# Altium PCB Bee Hive MainBoard PCB.PcbDoc
Units mm, origin at the board's own origin, x right, y up, seen from the top; angles counter-clockwise.
Board outline 90 x 57 mm, 2 copper layers (Top Layer, Bottom Layer), stack 1.671 mm thick; 32 components, 36 nets, 165 pads, 50 vias.
Unrouted connection lines stored in the file: 173.
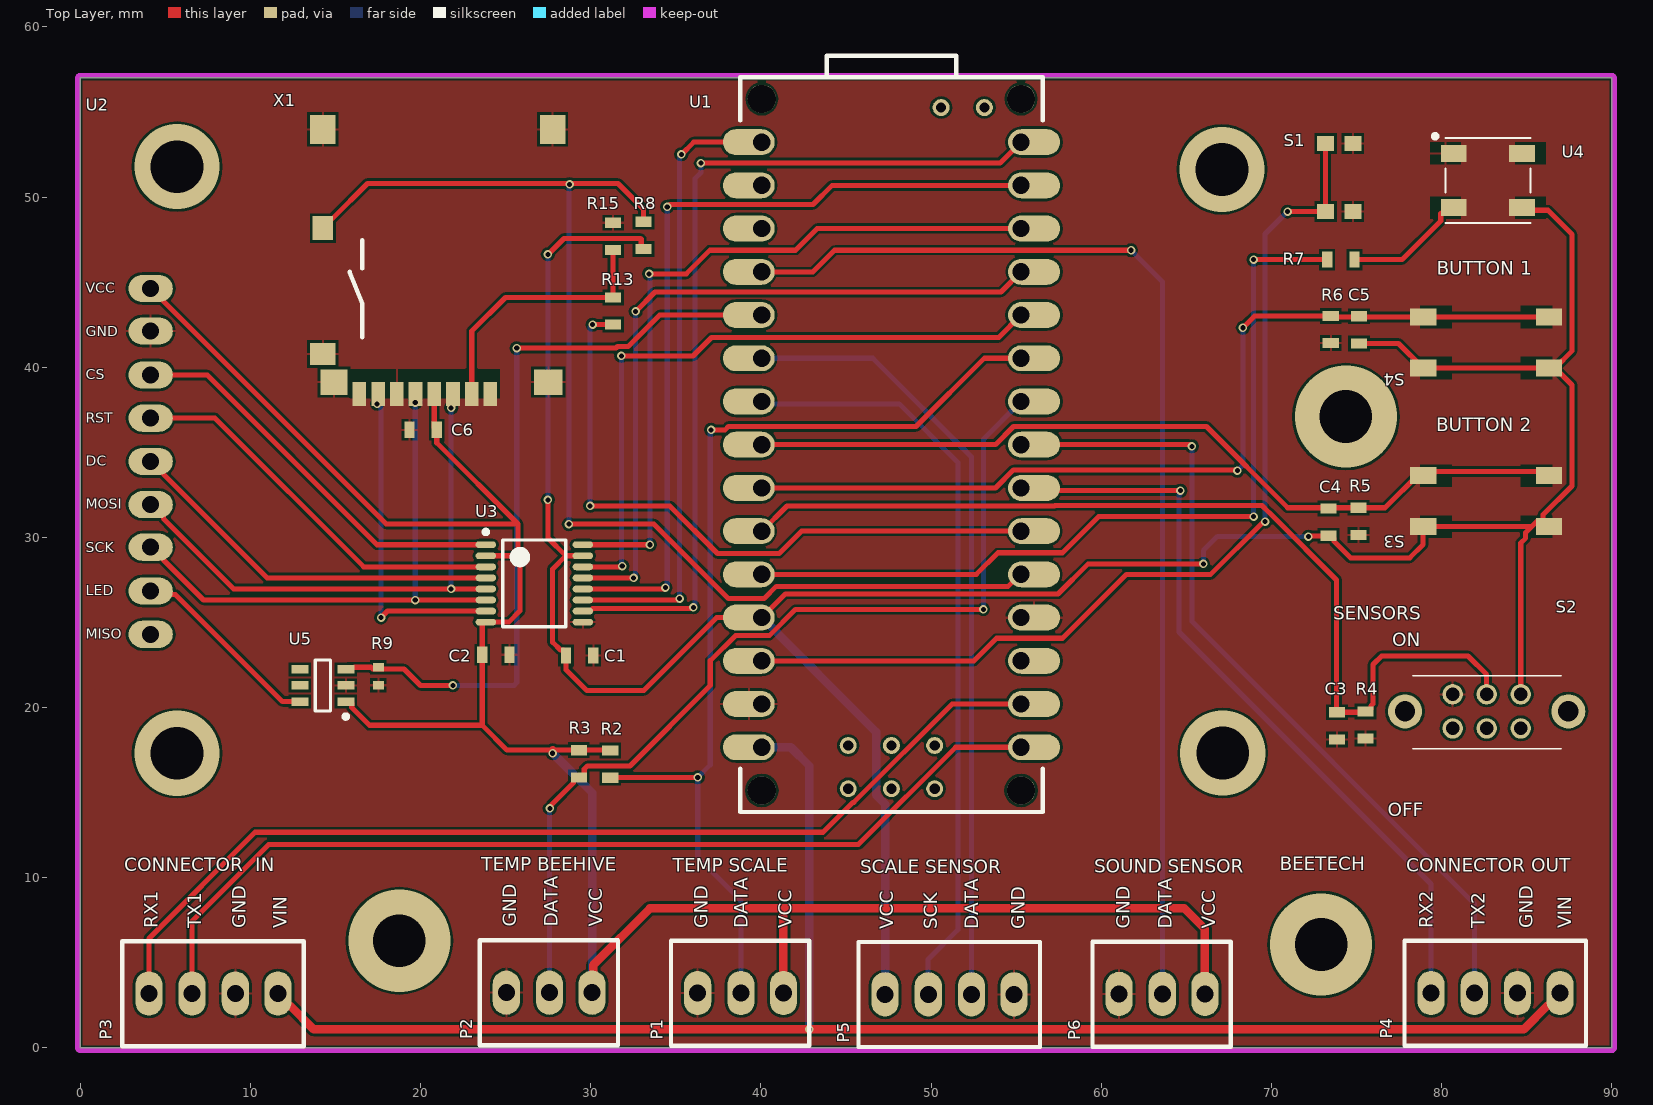
[diagram p0: Top Layer view]
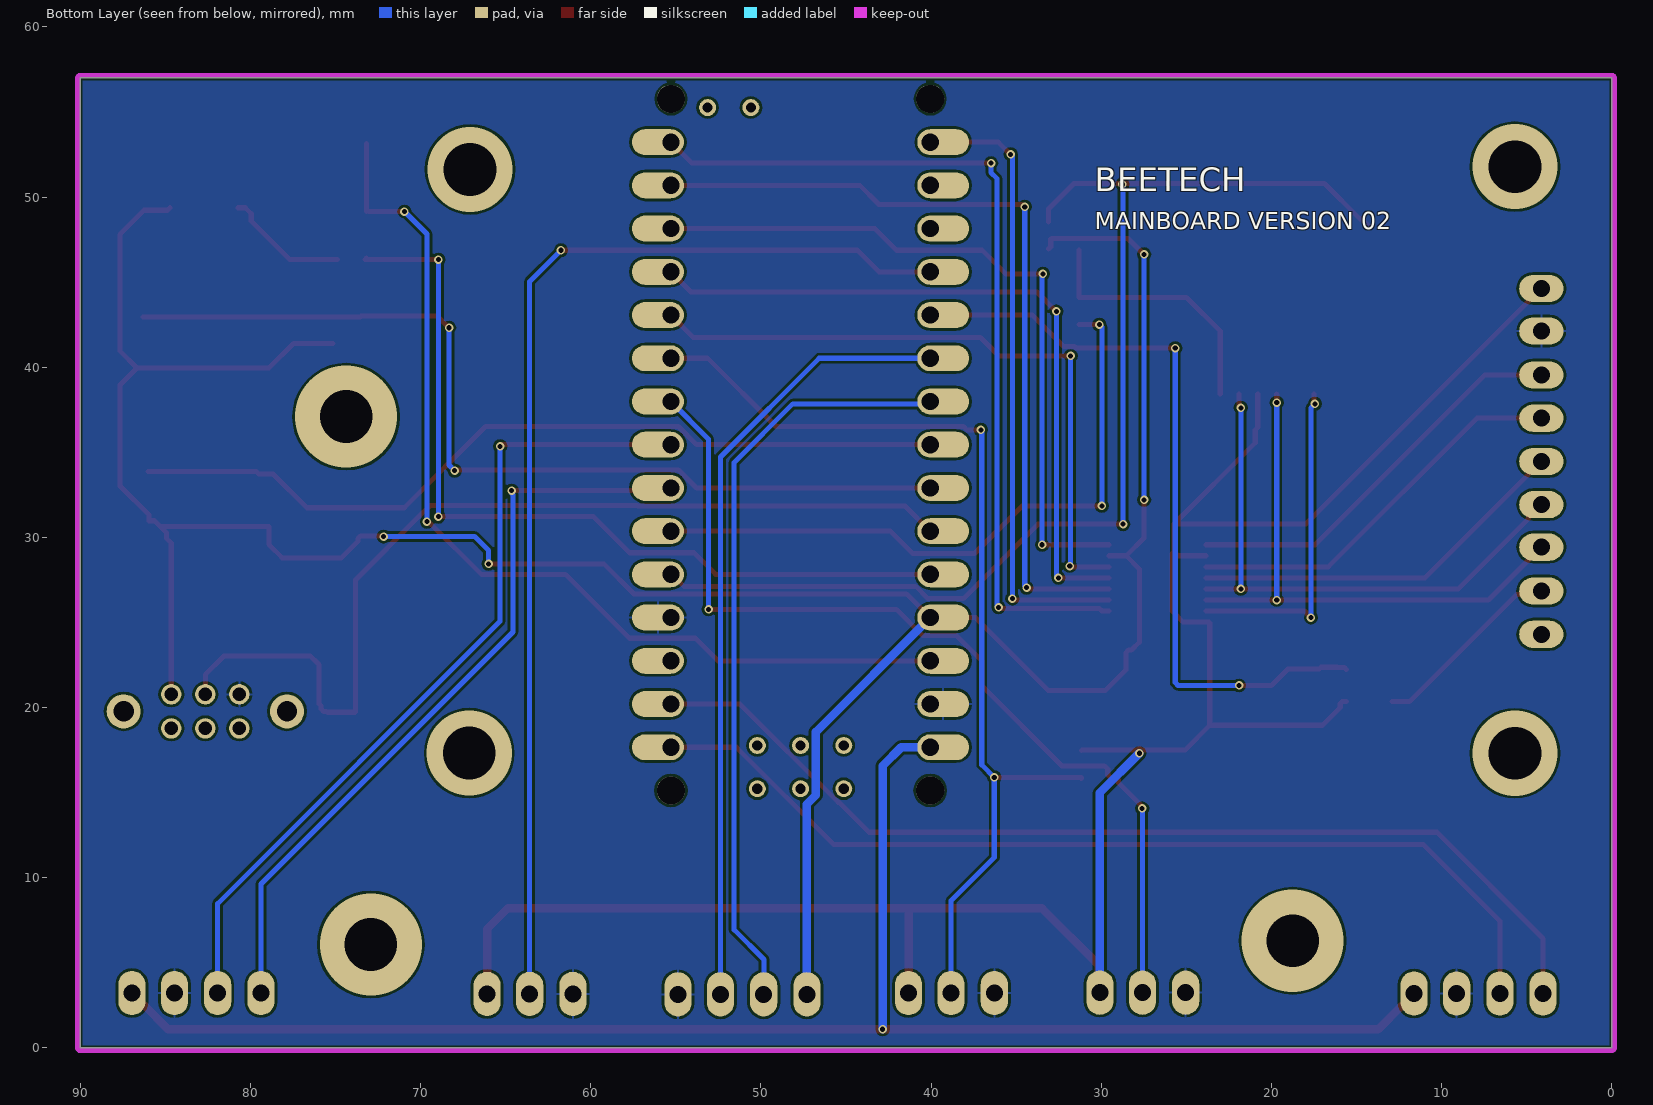
[diagram p1: Bottom Layer view, seen from below]

## Layer stack, top to bottom
Top Solder: solder mask 0.0102, Solder Resist, Dk 3.5
Top Layer: signal copper 0.0356
Dielectric1: core 1.6, FR-4, Dk 4.8
Bottom Layer: signal copper 0.0356
Bottom Solder: solder mask 0.0102, Solder Resist, Dk 3.5

## Board outline
0,0 90,0 90,57 0,57

## Design rules (kind name [scope] priority, off if disabled: settings)
Clearance Clearance_1 [InNamedPolygon('SW_L01_P024')] p1: gap=0.254 ignorepadtopadclearanceinfootprint=FALSE except(0: Arc-Hole Track-Hole SMDPad-Hole THPad-Hole Via-Hole Fill-Hole Poly-Hole Region-Hole Text-Hole)
Clearance [All] p2: gap=0.15 ignorepadtopadclearanceinfootprint=FALSE
ComponentClearance [All] p1: gap=0.001 collisioncheckmode=3 verticalgap=0.254 showdistances=FALSE
FabricationTestPointUsage [All] p1 off: valid=0 allowmultiple=FALSE
FabricationTestpoint [All] p1 off: side=3 testpointundercomponent=TRUE minsize=1.016 maxsize=2.54 preferedsize=1.524 minholesize=0 maxholesize=1.016 preferedholesize=0.813 testpointgrid=0.025 allowsidetop=TRUE allowsidebottom=TRUE usegrid=TRUE gridtolerance=0
HoleSize [All] p1: absolutevalues=TRUE maxlimit=6 minlimit=0.025 maxpercent=80.000 minpercent=20.000
HoleToHoleClearance [All] p1: gap=0 allowstackedmicrovias=TRUE
MinimumSolderMaskSliver [All] p1: minsoldermaskwidth=0
PolygonConnect PolygonConnect_14 [All vs IsNamedPolygon('GND_L01_P041')] p1: connectstyle=Relief reliefconductorwidth=0.15 reliefentries=4 polygonreliefangle="90 Angle" airgapwidth=0.15
PolygonConnect V_BAT_L01_P036 [All vs IsNamedPolygon('V_BAT_L01_P036')] p2: connectstyle=Direct reliefconductorwidth=0.254 reliefentries=4 polygonreliefangle="90 Angle" airgapwidth=0.254
PolygonConnect V_BAT2 [All vs IsNamedPolygon('V_BAT2_L01_P004')] p3: connectstyle=Direct reliefconductorwidth=0.254 reliefentries=4 polygonreliefangle="90 Angle" airgapwidth=0.254
PolygonConnect V_BAT [All vs IsNamedPolygon('V_BAT_L01_P010')] p4: connectstyle=Direct reliefconductorwidth=0.254 reliefentries=4 polygonreliefangle="90 Angle" airgapwidth=0.254
PolygonConnect V_SYS2 [All vs IsNamedPolygon('V_SYS2_L01_P012')] p5: connectstyle=Direct reliefconductorwidth=0.254 reliefentries=4 polygonreliefangle="90 Angle" airgapwidth=0.254
PolygonConnect +3.3b_uBlox [All vs IsNamedPolygon('+3.3V_UBLOX_L01_P014')] p6: connectstyle=Direct reliefconductorwidth=0.254 reliefentries=4 polygonreliefangle="90 Angle" airgapwidth=0.254
PolygonConnect V_LIPO_SYS_L01_P016 [All vs IsNamedPolygon('V_LIPO_SYS_L01_P016')] p7: connectstyle=Direct reliefconductorwidth=0.254 reliefentries=4 polygonreliefangle="90 Angle" airgapwidth=0.254
PolygonConnect V_LIPO_SYS_L01_P020 [All vs IsNamedPolygon('V_LIPO_SYS_L02_P020')] p8: connectstyle=Direct reliefconductorwidth=0.254 reliefentries=4 polygonreliefangle="90 Angle" airgapwidth=0.254
PolygonConnect V_SYS_L02_P024 [All vs IsNamedPolygon('V_SYS_L02_P024')] p9: connectstyle=Direct reliefconductorwidth=0.254 reliefentries=4 polygonreliefangle="90 Angle" airgapwidth=0.254
PolygonConnect VCC_USB_5.0V_L01_P026 [All vs IsNamedPolygon('VCC_USB_5.0V_L01_P026')] p10: connectstyle=Direct reliefconductorwidth=0.254 reliefentries=4 polygonreliefangle="90 Angle" airgapwidth=0.254
PolygonConnect SW [All vs IsNamedPolygon('SW_L01_P008')] p11: connectstyle=Direct reliefconductorwidth=0.254 reliefentries=4 polygonreliefangle="90 Angle" airgapwidth=0.254
PolygonConnect [All] p12: connectstyle=Relief reliefconductorwidth=0.15 reliefentries=4 polygonreliefangle="90 Angle" airgapwidth=0.15
RoutingVias [All] p1: holewidth=0.3 width=0.5 viastyle="Through Hole" minholewidth=0.2 minwidth=0.3 maxholewidth=1.2 maxwidth=2 useviatemplates=TRUE viatemplateguid#1={68F519FB-439D-452A-8ACF-2DE296BA9197} viatemplateguid#2={5ED9683F-E5DF-4E78-BDB1-49E541A8EC46} viatemplateguid#3={FAFF2F81-81C9-46E2-9D3D-D8AEF9417303} viatemplateguid#4={175E6F9D-763D-42D4-A59E-C21ACC7DA2E1} viatemplatename#1=v50h30m0mx0 viatemplatename#2=v50h30m50mx0 viatemplatename#3=v50h20 viatemplatename#4=v50h20mx0
SilkToSilkClearance [All] p1: silktosilkclearance=0.152
SilkToSolderMaskClearance [IsPad] p1: minsilkscreentomaskgap=0.127 clearancetoexposedcopper=TRUE
SolderMaskExpansion [All] p1: expansion=0.102 istentingtop=FALSE
Width [All] p1: maxlimit=5.08 minlimit=0.01 preferedwidth=0.305 minimp=50.000000 maximp=50.000000 favimp=50.000000
22 further rules are at their usual default settings.

## Components (designator, comment, footprint, x,y, rotation, side; value= is the part's Value field where it differs from the comment)
C1 "100nF 0603_1" "CAP 0603" 29.349,23.055 r180 top value=100nF
C2 "100nF 0603_1" "CAP 0603" 24.424,23.106 r180 top value=100nF
C3 "100nF 0603" "CAP 0603" 73.85,18.925 r270 top value=100nF
C4 "100nF 0603" "CAP 0603" 73.348,30.895 r90 top value=100nF
C5 "100nF 0603" "CAP 0603" 75.149,42.202 r90 top value=100nF
C6 "10uF 0603" "CAP 0603" 20.151,36.325 r0 top value=10uF
P1 "3-Pin Right Angle Housing" "3PIN - RND 205-EK254-2.54-03P" 41.325,3.225 r270 top
P2 "3-Pin Right Angle Housing" "3PIN - RND 205-EK254-2.54-03P" 30.078,3.25 r270 top
P3 "4-Pin Right Angle Housing" "4PIN - RND 205-EK254-2.54-04P" 11.615,3.2 r270 top
P4 "4-Pin Right Angle Housing" "4PIN - RND 205-EK254-2.54-04P" 86.965,3.225 r270 top
P5 "4-Pin Right Angle Housing" "4PIN - RND 205-EK254-2.54-04P" 54.875,3.15 r270 top
P6 "3-Pin Right Angle Housing" "3PIN - RND 205-EK254-2.54-03P" 66.09,3.175 r270 top
R2 "4.7k Ohm 0603" "RES 0603 FOOTPRINT" 31.15,16.675 r270 top value=4.7k
R3 "4.7k Ohm 0603" "RES 0603 FOOTPRINT" 29.3,16.7 r270 top value=4.7k
R4 "1k Ohm 0603" "RES 0603 FOOTPRINT" 75.525,18.978 r90 top value=1k
R5 "10k Ohm 0603" "RES 0603 FOOTPRINT" 75.123,30.945 r90 top value=10k
R6 "10k Ohm 0603" "RES 0603 FOOTPRINT" 73.489,42.22 r90 top value=10k
R7 "470 Ohm 0603" "RES 0603 FOOTPRINT" 74.075,46.325 r0 top value=470
R8 "47k Ohm 0603" "RES 0603 FOOTPRINT" 33.096,47.752 r270 top value=47k
R9 "47k Ohm 0402" "RES 0402 FOOTPRINT" 17.526,21.844 r90 top value=47k
R13 "2k Ohm 0603" "RES 0603 FOOTPRINT" 31.316,43.307 r270 top value=2k
R15 "2k Ohm 0603" "RES 0603 FOOTPRINT" 31.316,47.692 r270 top value=2k
S1 "Taster Print_SMD_2" "Taster Print - SMD - KMR241G LFS" 73.989,51.15 r270 top
S2 "Schiebeschalter EG2207" "Schiebeschalter on-on 2 P, EG2207" 82.65,19.778 r0 top
S3 "Taster Print_SMD_3" "Taster Print - SMD - PTS647SM70SMTR2LFS" 82.616,32.134 r180 top
S4 "Taster Print_SMD_3" "Taster Print - SMD - PTS647SM70SMTR2LFS" 82.616,41.456 r180 top
U1 "Arduino Nano Every" "Arduino Nano Every" 38.78,57.04 r270 top locked
U2 "TFT 2.2 SPI 240x320" "TFT 2.2 SPI 240x320" 4.14,44.628 r0 top locked
U3 "TXB0106" TSSOP-16L 26.685,27.297 r0 top
U4 "neoPixel" "neoPixel 5050 adafruit 1655" 82.725,50.975 r180 top
U5 "TPS22917DBVT" "SOT23 - 6" 14.255,21.3 r180 top
X1 "SD micro Card Holder_2" "SD Card Holder - micro - 2 - sd Card inserted" 15.005,54.83 r0 top locked

## Footprints (in the part's own frame and the unit in brackets; to place one, negate y for a bottom-side part, rotate by r counter-clockwise, add the part's x,y. Pads: shape width x height; smd on the part's side, far side on the other; paste and mask are expansions set on the pad)
"3PIN - RND 205-EK254-2.54-03P" [mm] "RND 205-EK254-2.54-03P"
  oval 2.6x1.6 hole 1: 1(0,0) 2(0,-2.5) 3(0,-5.04)
  silkscreen extent -3.07,-6.6 3.1,1.52, body extent -3.1,-6.55 3.1,1.53, height 8.51
"4PIN - RND 205-EK254-2.54-04P" [mm] "RND 205-EK254-2.54-04P"
  oval 2.6x1.6 hole 1: 1(0,0) 2(0,-2.5) 3(0,-5.04) 4(0,-7.58)
  silkscreen extent -3.07,-9.14 3.1,1.52, body extent -3.1,-9.1 3.1,1.52, height 8.51
"Arduino Nano Every" [mil] "Arduino Nano Every"
  oval 60x120 hole 40 copper offset 0,-30: 1(150,50) 2(250,50) 3(350,50) 4(450,50) 5(550,50) 6(650,50) 7(750,50) 8(850,50) 9(950,50) 10(1050,50) 11(1150,50) 12(1250,50) 13(1350,50) 14(1450,50) 15(1550,50)
  oval 60x120 hole 40 copper offset 0,30: 16(1550,650) 16(1550,650) 17(1450,650) 18(1350,650) 19(1250,650) 20(1150,650) 21(1050,650) 22(950,650) 23(850,650) 24(750,650) 25(650,650) 26(550,650) 27(450,650) 28(350,650) 29(250,650) 30(150,650)
  round 39.37 hole 23.62: 50(70,565) 51(70,465) 61(1545.98,250) 62(1645.98,250) 63(1545.98,350) 64(1645.98,350) 65(1545.98,450) 66(1645.98,450)
  round 65 hole 65 unplated: MH1(50,650) MH2(50,50) MH3(1650,50) MH4(1650,650)
  silkscreen extent -50,0 1700,700, body extent -40,0 1700,700, height 136
"CAP 0603" [mm] "CAP 0603"
  rect 0.6x0.95 smd: 1(-0.8,0) 2(0.8,0)
  body extent -0.8,-0.4 0.8,0.4, height 0.8
"neoPixel 5050 adafruit 1655" [mm] "neoPixel 5050 adafruit 1655"
  rect 1.5x1 smd: 1(2,-1.6) 2(2,1.6) 3(-2,1.6) 4(-2,-1.6)
  silkscreen extent -2.5,-2.72 3.22,2.5, body extent -2.5,-2.5 2.5,2.5, height 2
"RES 0402 FOOTPRINT" [mm] "Chip Capacitor, 2-Leads, Body 1.00x0.50mm, IPC Medium Density"
  rect 0.5x0.64 smd: 1(-0.53,0) 2(0.53,0)
  body extent -0.5,-0.25 0.5,0.25, height 0.35
"RES 0603 FOOTPRINT" [mm] "RES 0603 FOOTPRINT"
  rect 0.6x0.95 smd: 1(-0.8,0) 2(0.8,0)
  body extent -0.8,-0.4 0.8,0.4, height 0.8
"Schiebeschalter on-on 2 P, EG2207" [mm] "Schiebeschalter on-on 2 P, EG2207"
  round 1.2 hole 0.8: 1(-2,1) 2(0,1) 3(2,1) 4(-2,-1) 5(0,-1) 6(2,-1)
  round 2 hole 1.2: 10(-4.8,0) 10(4.8,0)
  silkscreen extent -4.33,-2.2 4.37,2.1, body extent -4.98,-3.05 5.02,2.95, height 7.7
"SD Card Holder - micro - 2 - sd Card inserted" [mm] "micro SD Card holder, Molex Part Number:   502774-0891"
  rect 0.8x1.4 smd: 1(9.1,-16.4) 2(8,-16.4) 3(6.9,-16.4) 4(5.8,-16.4) 5(4.7,-16.4) 6(3.6,-16.4) 7(2.5,-16.4) 8(1.4,-16.4)
  rect 1.2x1.4 smd: 10(-0.75,-6.65)
  rect 1.5x1.3 smd: 20(-0.75,-14.05)
  rect 1.5x1.7 smd: 20(-0.75,-0.85) 20(12.75,-0.85)
  rect 1.6x1.5 smd: 20(-0.1,-15.7)
  rect 1.7x1.5 smd: 20(12.5,-15.7)
  silkscreen extent 0.82,-13.08 1.57,-7.37, body extent -1,-16.1 13.3,2.2, height 1.81
"SOT23 - 6" [mm] "SOT23, 6-Leads, Body 2,90x2,80mm, Pitch 0,95mm, IPC Medium Density"
  rect 1x0.5 smd: 1(-1.35,0.95) 2(-1.35,0) 3(-1.35,-0.95) 4(1.35,-0.95) 5(1.35,0) 6(1.35,0.95)
  silkscreen extent -1.48,-1.5 0.45,1.95, body extent -0.85,-1.5 0.85,1.5, height 1.1
"Taster Print - SMD - KMR241G LFS" [mm] "http://ch.farnell.com/c-k-components/kmr241g-lfs/taster-smd-4n/dp/1437637"
  rect 0.9x1 smd: 1(-2,0.8) 2(-2,-0.8) 10(2,0.8) 20(2,-0.8)
  body extent -2.3,-1.4 2.3,1.4, height 1.93
"Taster Print - SMD - PTS647SM70SMTR2LFS" [mm] "https://www.mouser.ch/ProductDetail/CK/PTS647SM70SMTR2LFS?qs=PqoDHHvF64%252Bxl5nIb9IaOw%3D%3D"
  rect 1.55x1 smd: 1(3.7,1.5) 2(-3.7,1.5) 3(3.7,-1.5) 4(-3.7,-1.5)
  body extent -3.28,-2.22 3.22,2.28, height 7.2
"TFT 2.2 SPI 240x320" [mm]
  oval 2.6x1.6 hole 1: 1(0,0) 2(0,-2.5) 3(0,-5.08) 4(0,-7.62) 5(0,-10.16) 6(0,-12.7) 7(0,-15.2) 8(0,-17.78) 9(0,-20.32)
  body extent -1.52,-30.16 65.98,9.84, height 14.41
TSSOP-16L [mm] "TSOP, 16-Leads, Body 5,00x4,40mm, Pitch 0,65mm, IPC High Density"
  oval 1.2x0.4 smd: 1(-2.85,2.275) 2(-2.85,1.625) 3(-2.85,0.975) 4(-2.85,0.325) 5(-2.85,-0.325) 6(-2.85,-0.975) 7(-2.85,-1.625) 8(-2.85,-2.275) 9(2.85,-2.275) 10(2.85,-1.625) 11(2.85,-0.975) 12(2.85,-0.325) 13(2.85,0.325) 14(2.85,0.975) 15(2.85,1.625) 16(2.85,2.275)
  silkscreen extent -2.97,-2.55 1.85,3.15, body extent -2.25,-2.55 2.25,2.55, height 1.2

## Part data
C1 C2 C3 C4 C5 C6: "C CERAMIC SMD", Bezeichnung="C SMD", Haendler=Mouser, housing/footprint=0603
  C1 C2: Haendler Nr=603-CC0603JPX79BB104, Hersteller=Yageo, Hersteller Nr=CC0603JPX7R9BB104, Preis (CHF)=0.15, Umax=50V
  C3 C4 C5: Haendler Nr=710-885012206020, Hersteller=Würth, Hersteller Nr=885012206020, Preis (CHF)=0.05, Umax=10V
  C6: Dielektrikum=X5R, Haendler Nr=810-C1608X5R1A106K, Hersteller=TDK, Hersteller Nr=C1608X5R1A106K080AC, Preis (CHF)=0.5, Umax=10V
P1 P2 P6: library part "3-Pin Screw Terminal", "3-Pin", ComponentLink1Description=Mouser, ComponentLink1URL=https://www.mouser.ch/ProductDetail/TE-Connectivity/640453-2?qs=sGAEpiMZZMs%252bGHln7q6pm5E1Eb6qwPl2KIU5TYv3tVY%3d, Haendler=Distrelec, Haendler Nr=301-27-919, Preis (CHF)=0.60
P3 P4 P5: library part "4-Pin Screw Terminal", "4-Pin", ComponentLink1Description=Mouser, ComponentLink1URL=https://www.mouser.ch/ProductDetail/TE-Connectivity/640453-2?qs=sGAEpiMZZMs%252bGHln7q6pm5E1Eb6qwPl2KIU5TYv3tVY%3d, Haendler=Distrelec, Haendler Nr=301-27-920, Hersteller=RND, Hersteller Nr="RND 205-EK254-2.54-04P", Preis (CHF)=0.60
R2 R3 R4 R5 R6 R7 R8 R9 R13 R15: "R SMD", Bezeichnung="R SMD"
  R2 R3: Haendler=Mouser, Haendler Nr=755-ESR03EZPF4701, housing/footprint=0603, Preis (CHF)=0.01
  R4: Haendler=Mouser, Haendler Nr=71-CRCW06031K00FKEAC, Hersteller Nr=CRCW06031K00FKEAC, housing/footprint=0603, Preis (CHF)=0.01
  R5 R6: Haendler=Mouser, Haendler Nr=603-AC0603FR-0710KL, Hersteller=Yageo, Hersteller Nr=AC0603FR-0710KL, housing/footprint=0603, Preis (CHF)=0.01
  R7: Haendler=Mouser, Haendler Nr=594-MCT06030C4700FP5, housing/footprint=0603, Preis (CHF)=0.15
  R8: Haendler=Mouser, Haendler Nr=603-AC0603FR-0747KL, Hersteller=Yageo, Hersteller Nr=AC0603FR-0747KL, housing/footprint=0603, Preis (CHF)=0.01
  R9: Haendler=MOUSER, Haendler Nr=667-ERJ-2RKF4702X, Hersteller=PANASONIK, Hersteller Nr=ERJ-2RKF4702X, housing/footprint=0402, Preis (CHF)=0.01
  R13 R15: Haendler=Farnell, Haendler Nr=2447319, Hersteller=VISHAY, housing/footprint=0603, Preis (CHF)=0.01
S1: "Taster", Haendler=Mouser, Haendler2=Farnell, Haendler2 Nr=1437637, Haendler Nr=611-KMR241GLFS, Hersteller=C&K, Hersteller Nr="KMR241G LFS", link=http://ch.farnell.com/c-k-components/kmr241g-lfs/taster-smd-4n/dp/1437637, Link Hersteller=http://www.ckswitches.com/products/switches/product-details/Tactile/KMR2/KMR241NGLFS/, Preis (CHF)=0.5
S2: "Schiebeschalter on-on PCM12SMTR", ComponentLink1Description=C&K, ComponentLink1URL=https://www.ckswitches.com/products/switches/product-details/Slide/AYZ/AYZ0202AGRLC/, Haendler=Mouser, Haendler Nr=612-EG2207, Hersteller="E SWITCH", Hersteller Nr=EG2207, Preis (CHF)=0.66
S3 S4: library part "Taster Print_SMD_6", "Taster", ComponentLink1Description=link, ComponentLink1URL=https://www.digikey.ch/product-detail/de/wurth-electronics-inc/430473035826/732-7021-1-ND/5225469, Haendler=Mouser, Haendler Nr=611-PTS647SM70SMTR2L, link=https://www.mouser.ch/ProductDetail/CK/PTS647SM70SMTR2LFS?qs=PqoDHHvF64%252Bxl5nIb9IaOw%3D%3D, Preis (CHF)=0.38
U1: "https://store.arduino.cc/nano-every-pack", ComponentLink3URL=http://ch.farnell.com/stmicroelectronics/stm32l496vgt6/mcu-arm-cortex-m4-80mhz-lqfp-100/dp/2725139?st=STM32L496VGT6, Haendler=Mouser, Haendler Nr=782-ABX00028, link=https://store.arduino.cc/nano-every-pack, Link 2=https://www.mouser.ch/ProductDetail/Arduino/ABX00028?qs=PzGy0jfpSMtit6rnFl8mVg%3D%3D, Preis (CHF)=11.21
U2: "https://www.banggood.com/1_441_82_02_22_4-Inch-TFT-LCD-Display-Module-Colorful-Screen-Module-SPI-Interface-p-1494883.html?rmmds=search&ID=6211522&cur_warehouse=CN", ComponentLink3URL=http://ch.farnell.com/stmicroelectronics/stm32l496vgt6/mcu-arm-cortex-m4-80mhz-lqfp-100/dp/2725139?st=STM32L496VGT6, Haendler="Banggood / Aliexpress", link=https://www.banggood.com/1_441_82_02_22_4-Inch-TFT-LCD-Display-Module-Colorful-Screen-Module-SPI-Interface-p-1494883.html?rmmds=search&ID=6211522&cur_warehouse=CN, Link 2=https://de.aliexpress.com/item/4000839144387.html?spm=a2g0o.productlist.0.0.48ed5371jjv3wJ&algo_pvid=f087815a-197e-468a-8055-d99fc6734484&algo_expid=f087815a-197e-468a-8055-d99fc6734484-8&btsid=0ab50f6115912653966648062e4a8e&ws_ab_test=searchweb0_0,searchweb201602_,searchweb201603_, Preis (CHF)=6
U3: library part "TXB0106 Level Converter", "Level Converter TXB0106", Haendler=Mouser, Haendler2=Farnell, Haendler2 Nr=1694679, Haendler Nr=595-TXB0106PWR, Hersteller="Texas Instruments", Hersteller Nr=TXB0106, link=http://ch.farnell.com/texas-instruments/txb0106pwr/txb-transceiver-tssop16/dp/1694679?ost=1694679&searchView=table&iscrfnonsku=false&ddkey=http%3Ade-CH%2FElement14_Switzerland%2Fsearch, Preis (CHF)=1.45
U4: library part "neoPixel 5050 adafruit 1655", "neoPixel 5050 adafruit 1655", ComponentLink1Description=Mouser, ComponentLink1URL=https://www.mouser.ch/ProductDetail/TE-Connectivity/640453-2?qs=sGAEpiMZZMs%252bGHln7q6pm5E1Eb6qwPl2KIU5TYv3tVY%3d, Haendler=Mouser, Haendler Nr=485-1655, Hersteller=Adafruit, Hersteller Nr=1655, Preis (CHF)=0.60
U5: "High Side Switch", Code_JEDEC="SOT 23-6", Haendler=Mouser, Haendler Nr=595-TPS22917DBVT, Hersteller=TI, Hersteller Nr=TPS22917DBVT, link=https://www.mouser.ch/ProductDetail/Texas-Instruments/TPS22917DBVT?qs=sGAEpiMZZMve4%2fbfQkoj%252bPJ2V24ZqG0%252bKgHGtqls2rU%3d, Preis (CHF)=0.6
X1: "SD micro Card  Holder", Haendler=Mouser, Haendler2=Farnell, Haendler2 Nr=2064063, Haendler Nr=538-502774-0891, Hersteller=Molex, Hersteller Nr=502774-0891, Preis (CHF)=3.15

## Via types
v1: diameter 0.5, hole 0.3, Top Layer to Bottom Layer, tented both sides, 43 vias
v2: diameter 5, hole 3.1, Top Layer to Bottom Layer, tented both sides, 4 vias
v3: diameter 6, hole 3.1, Top Layer to Bottom Layer, 3 vias

## Nets (pads, with @x,y where several pads share a name; then routed paths per layer and width w, separated by ;. In a path a pad name is that pad's centre, name@x,y a point inside that pad or via, vN(x,y) a via of type N, cw(c..) or ccw(c..) an arc to the next point about the centre after c; other vN are vias at no path point)
BUTTON_1: C4.2 R5.2 S3.3 S3.4 U1.8 | length 49.2
  Top Layer w0.3: U1.8 53.788,35.45 54.85,36.512 66.188,36.512 70.955,31.745 73.298,31.745 C4.2 ; C4.2@73.398,31.745 R5.2 76.677,31.745 78.666,33.734 79.516,33.734 79.666,33.884 S3.4@86.01,33.884
BUTTON_2: C5.2 R6.2 S4.3 S4.4 U1.9 | length 55.3
  Top Layer w0.3: U1.9 53.788,32.91 54.85,33.972 67.809,33.972 67.819,33.962 67.96,33.962 v1(67.999,33.924) ; v1(68.325,42.325) 69.02,43.02 R6.2 73.553,42.956 S4.3 S4.4
  Bottom Layer w0.3: v1(67.999,33.924) 68.325,34.25 v1(68.325,42.325)
"CD SD 5V": R8.1 U1.20 X1.10 | length 70.3
  Top Layer w0.3: X1.10 14.255,48.28 14.705,48.73 14.805,48.73 16.876,50.802 31.596,50.802 33.096,49.301 R8.1 ; v1(28.717,30.784) 33.709,30.784 38.086,26.407 40.19,26.407 40.908,27.125 54.53,27.125 55.235,27.83 U1.20
  Bottom Layer w0.3: v1(28.717,30.784) 28.717,50.713 v1(28.753,50.749)
CS: U1.28 U3.16 | length 42.8
  Top Layer w0.3: U3.16 v1(33.475,29.572) ; v1(33.426,45.491) 35.614,45.491 36.998,46.875 42.037,46.875 43.312,48.15 U1.28
  Bottom Layer w0.3: v1(33.426,45.491) 33.465,45.453 33.465,45.312 33.475,45.301 v1(33.475,29.572)
"CS SD 5V": R13.2 U1.21 | length 39
  Top Layer w0.3: v1(29.962,31.848) 34.649,31.848 37.447,29.05 41.072,29.05 42.391,30.37 U1.21 ; v1(30.112,42.507) R13.2
  Bottom Layer w0.3: v1(29.962,31.848) 29.962,42.357 v1(30.112,42.507)
"CS SD CARD": R13.1 R15.2 X1.2 | length 15.6
  Top Layer w0.3: X1.2 23.005,42.128 24.983,44.107 R13.1 R15.2
"CS TFT": U2.3 U3.1 | length 23.8
  Top Layer w0.3: U2.3 7.468,39.548 17.444,29.572 U3.1
DATA_TEMP_1: P1.2 R2.2 U1.25 | length 59.6
  Top Layer w0.3: R2.2@31.175,15.85 R2.2 31.175,15.9 v1(36.285,15.9) ; v1(37.075,36.325) 37.899,36.325 38.086,36.512 49.113,36.512 53.131,40.53 U1.25
  Bottom Layer w0.3: v1(37.075,36.325) 37.037,36.287 37.037,36.145 37.025,36.134 37.025,16.64 v1(36.285,15.9) 36.285,11.19 38.825,8.65 P1.2
DATA_TEMP_2: P2.2 R3.2 U1.24 | length 55.5
  Top Layer w0.3: v1(27.6,14.075) 27.638,14.113 27.638,14.238 28.975,15.575 28.975,15.75 29.125,15.9 R3.2 29.468,15.9 29.618,16.05 29.618,16.393 29.8,16.575 32.3,16.575 37.025,21.3 37.025,22.751 38.502,24.228 40.49,24.228 42.037,25.775 v1(53.075,25.775)
  Bottom Layer w0.3: P2.2 27.578,14.053 v1(27.6,14.075) ; v1(53.075,25.775) 53.075,35.775 U1.24
DC: U1.27 U3.13 | length 42.3
  Top Layer w0.3: U3.13 v1(32.513,27.622) ; v1(32.639,43.282) 33.782,44.425 54.105,44.425 U1.27
  Bottom Layer w0.3: v1(32.513,27.622) 32.639,27.748 v1(32.639,43.282)
"DC TFT": U2.5 U3.4 | length 22.6
  Top Layer w0.3: U2.5 4.288,34.468 4.889,33.867 4.889,33.719 10.986,27.622 U3.4
DT_HX711: P5.2 U1.6 | length 46.3
  Bottom Layer w0.3: U1.6 46.573,40.53 52.375,34.728 P5.2
GND: C1.1 C2.1 C3.2 C6.1 P1.3 P2.3 P3.2 P4.2 P5.1 P6.3 R4.1 R5.1 R6.1 R9.1 R15.1 S1.1 S1.10 S2.1 U1.14 U1.19 U2.2 U3.9 U4.1 U5.2 X1.6 X1.20
"LED TFT": U2.8 U5.6 | length 11.5
  Top Layer w0.3: U2.8 4.35,26.638 5.598,26.638 11.887,20.35 U5.6
MISO: U1.30 U3.10 | length 52.2
  Top Layer w0.3: U3.10 29.962,25.672 30.112,25.822 35.965,25.822 v1(36.034,25.891) ; v1(36.474,51.994) 54.054,51.994 U1.30
  Bottom Layer w0.3: v1(36.034,25.891) 36.119,25.975 36.119,51.079 36.474,51.435 v1(36.474,51.994)
"MISO 3.3V": U3.7 X1.7 | length 19.6
  Top Layer w0.3: v1(17.444,37.85) 17.482,37.888 17.482,38.03 17.505,38.052 X1.7 ; v1(17.676,25.29) 18.058,25.672 U3.7
  Bottom Layer w0.3: v1(17.444,37.85) 17.676,37.617 v1(17.676,25.29)
MOSI: U1.29 U3.12 | length 48.6
  Top Layer w0.3: U3.12 34.258,26.972 34.337,27.051 v1(34.392,27.051) ; v1(34.493,49.428) 34.638,49.573 34.821,49.573 34.83,49.563 43.06,49.563 44.187,50.69 U1.29
  Bottom Layer w0.3: v1(34.392,27.051) 34.493,27.153 v1(34.493,49.428)
"MOSI 3.3V": U2.6 U3.5 X1.3 | length 33.4
  Top Layer w0.3: U2.6 4.288,31.928 4.889,31.327 4.889,31.103 9.02,26.972 v1(21.799,26.972) U3.5 ; v1(21.799,37.617) 21.905,37.723 X1.3
  Bottom Layer w0.3: v1(21.799,26.972) v1(21.799,37.617)
NEO_PIX_DATA: R7.1 U1.11 | length 49.9
  Top Layer w0.3: U1.11 52.655,27.83 53.925,29.1 57.725,29.1 59.85,31.225 v1(68.95,31.225) ; v1(68.95,46.325) R7.1 R7.1@73.175,46.425
  Bottom Layer w0.3: v1(68.95,31.225) v1(68.95,46.325)
NetR7_2: R7.2 U4.2 | length 7.4
  Top Layer w0.3: R7.2 77.675,46.325 79.951,48.601 79.951,49.025 80.301,49.375 U4.2
RESETN: S1.2 S1.20 U1.13 | length 58
  Top Layer w0.3: U1.13 52.525,22.75 53.85,24.075 57.725,24.075 61.48,27.83 66.43,27.83 69.425,30.825 69.471,30.825 69.571,30.925 v1(69.625,30.925) ; v1(70.95,49.15) 73.039,49.15 73.114,49.225 S1.20 S1.2
  Bottom Layer w0.3: v1(69.625,30.925) 69.625,47.825 v1(70.95,49.15)
RST: U1.26 U3.14 | length 39.2
  Top Layer w0.3: U3.14 31.748,28.272 31.797,28.321 v1(31.852,28.321) ; v1(31.801,40.665) 36.004,40.665 37.094,41.755 53.975,41.755 U1.26
  Bottom Layer w0.3: v1(31.801,40.665) 31.801,28.372 v1(31.852,28.321)
"RST TFT": U2.4 U3.3 | length 23.3
  Top Layer w0.3: U2.4 7.925,37.008 16.661,28.272 U3.3
"RX 1": P3.4 U1.17 | length 60.2
  Top Layer w0.3: P3.4 4.035,6.435 10.275,12.675 43.65,12.675 45.407,14.432 45.461,14.432 51.239,20.21 U1.17
"RX 2": P4.4 U1.22 | length 45.1
  Top Layer w0.3: U1.22 55.45,32.75 v1(64.65,32.75)
  Bottom Layer w0.3: v1(64.65,32.75) 64.612,32.712 64.612,32.57 64.575,32.534 64.575,24.45 79.385,9.64 P4.4
SCK: U1.1 U3.11 | length 37
  Top Layer w0.3: U3.11 35.135,26.322 v1(35.221,26.407) ; v1(35.327,52.511) 36.046,53.23 U1.1 U1.1@40.03,53.25
  Bottom Layer w0.3: v1(35.221,26.407) 35.221,52.511 v1(35.327,52.511)
"SCK 3.3V": U2.7 U3.6 X1.5 | length 33.2
  Top Layer w0.3: U2.7 4.288,29.428 4.889,28.827 4.889,28.679 7.246,26.322 v1(19.685,26.322) U3.6 ; v1(19.685,37.922) 19.685,38.411 X1.5
  Bottom Layer w0.3: v1(19.685,26.322) v1(19.685,37.922)
SCK_HX711: P5.3 U1.7 | length 45
  Bottom Layer w0.3: U1.7 40.19,37.85 48.125,37.85 51.573,34.402 51.573,6.948 49.825,5.2 49.825,3.16 P5.3
SOUND_DATA: P6.2 U1.4 | length 66.7
  Top Layer w0.3: U1.4 43.06,45.61 44.325,46.875 v1(61.75,46.875)
  Bottom Layer w0.3: v1(61.75,46.875) 63.59,45.035 P6.2
SWITCH: C3.1 R4.2 S2.2 U1.10 | length 57.2
  Top Layer w0.3: U1.10 41.528,31.848 57.254,31.848 57.281,31.875 69.45,31.875 69.85,31.475 69.853,31.475 70.175,31.153 70.175,31.15 73.825,27.5 73.825,19.75 C3.1 75.472,19.725 R4.2 75.7,19.778 75.85,19.928 75.85,20.103 75.971,20.224 75.971,22.53 76.479,23.038 81.559,23.038 82.65,21.947 S2.2
"TFT LED ENABLE": R9.2 U1.5 U5.3 | length 45.5
  Top Layer w0.3: U5.3 15.705,22.35 16.106,22.35 16.13,22.374 17.093,22.374 17.191,22.276 19.025,22.276 20,21.3 v1(21.905,21.3) ; v1(25.654,41.123) 31.48,41.123 31.573,41.215 32.198,41.215 34.053,43.07 U1.5
  Bottom Layer w0.3: v1(21.905,21.3) 25.486,21.3 25.654,21.468 v1(25.654,41.123)
"TX 1": P3.3 U1.16 | length 57.2
  Top Layer w0.3: P3.3 6.575,7.198 6.572,7.201 6.572,7.449 11.073,11.95 45.725,11.95 51.445,17.67 U1.16@55.29,17.67
"TX 2": P4.3 U1.23 | length 49.1
  Top Layer w0.3: U1.23 65.171,35.45 65.271,35.35 v1(65.325,35.35)
  Bottom Layer w0.3: v1(65.325,35.35) 65.328,35.347 65.328,25.075 81.925,8.478 P4.3
"V IN": P3.1 P4.1 U1.15 | length 96.1
  Top Layer w0.5: P3.1 11.615,2.998 12.123,2.49 12.326,2.49 13.715,1.1 v1(42.849,1.1) 84.84,1.1 86.255,2.515 86.457,2.515 86.965,3.023 P4.1
  Bottom Layer w0.5: U1.15 41.754,17.67 42.849,16.575 v1(42.849,1.1)
"VCC 3.3V": C2.2 C6.2 P1.1 P2.1 P6.1 R2.1 R3.1 U2.1 U3.2 U3.8 U5.1 X1.4 | length 133.1
  Top Layer w0.3: U2.1 4.288,44.628 4.889,44.027 4.889,43.879 17.984,30.784 25.725,30.784 ; U5.1 15.855,20.35 15.955,20.25 15.955,20 16.994,18.961 23.624,18.961 ; X1.4 20.805,36.471 C6.2 20.951,35.558 25.725,30.784 ; U3.2 25.486,28.922 25.725,29.161 ; R2.1 31.125,17.5 R3.1 27.762,17.5 25.085,17.5 23.624,18.961 ; 23.624,18.961 C2.2 23.624,24.975 23.67,25.022 U3.8 25.185,25.022 25.835,25.672 25.835,29.05 25.725,29.161 ; 25.725,29.161 25.725,30.784
  Top Layer w0.5: v1(27.762,17.318) v1@27.762,17.5 ; P2.1 30.147,3.32 30.147,4.872 33.475,8.2 41.325,8.2 ; P1.1 41.325,8.2 ; P6.1 66.09,6.997 64.887,8.2 41.325,8.2
  Bottom Layer w0.5: v1(27.762,17.318) 30.078,15.002 P2.1
"VCC 5V": C1.2 C4.1 C5.1 P5.4 R8.2 S2.3 S3.1 S3.2 S4.1 S4.2 U1.12 U3.15 U4.3 | length 166.7
  Top Layer w0.3: v1(27.483,32.207) 27.483,29.974 28.535,28.922 ; v1(27.483,46.634) 28.423,47.574 32.92,47.574 32.968,47.526 32.968,47.08 R8.2 ; U3.15 28.535,28.922 ; v1(66,28.45) 59.236,28.45 57.461,26.675 41.435,26.675 U1.12 37.406,25.29 33.122,21.006 29.769,21.006 28.549,22.225 C1.2 28.549,23.23 28.399,23.38 28.224,23.38 27.762,23.842 27.762,28.149 28.535,28.922 ; v1(72.175,30.05) 72.229,30.05 72.274,30.095 C4.1 73.523,30.095 73.673,29.945 73.673,29.77 74.643,28.8 78.132,28.8 78.916,29.584 S3.1 85.291,30.634 ; C5.1 77.47,41.402 S4.1 S4.2 S4.2@86.666,39.956 ; S2.3 84.65,29.667 84.941,29.958 84.941,30.284 85.291,30.634 ; U4.3 84.874,49.226 86.249,49.226 87.675,47.8 87.675,40.965 S4.2@86.666,39.956 ; 85.291,30.634 85.64,30.983 85.966,30.983 85.966,31.332 87.659,33.025 87.659,38.963 S4.2@86.666,39.956
  Bottom Layer w0.3: v1(27.483,32.207) v1(27.483,46.634) ; v1(66,28.45) 66,29.23 66.82,30.05 v1(72.175,30.05)
  Bottom Layer w0.5: U1.12 46.77,18.57 46.77,14.859 47.295,14.334 P5.4
pads on no net: S2.4 S2.5 S2.6 S2.10 U1.2 U1.3 U1.18 U1.50 U1.51 U1.61 U1.62 U1.63 U1.64 U1.65 U1.66 U1.MH1 U1.MH2 U1.MH3 U1.MH4 U2.9 U4.4 U5.4 U5.5 X1.1 X1.8
copper on no net:
  other v2: 5.69,17.318 67.14,17.328 67.09,51.628 5.69,51.788
  other v3: 72.925,6.073 18.75,6.298 74.375,37.1

## Polygon pours and split planes (outlines as drawn)
GND on Top Layer "GND_L01_P000" (solid, pour order 0): 0,0 90,0 90,57 0,57
GND on Bottom Layer "GND_L02_P001" (solid, pour order 1): 0,0 90,0 90,57 0,57

## Keep-outs
Keep-Out Layer:
  lines w0.3: -0.15,0 ccw(c0,0) 0,-0.15 ; -0.15,0 ccw(c0,0) 0,-0.15 ; -0.15,0 -0.15,57 ; -0.15,57 cw(c0,57) 0,57.15 ; -0.15,57 cw(c0,57) 0,57.15 ; 0,-0.15 90,-0.15 ; 0,57.15 90,57.15 ; 90,-0.15 ccw(c90,0) 90.15,0 ; 90,-0.15 ccw(c90,0) 90.15,0 ; 90,57.15 cw(c90,57) 90.15,57 ; 90,57.15 cw(c90,57) 90.15,57 ; 90.15,0 90.15,57

## Silkscreen, mask and mechanical layers (free items; w line width, h text height)
Top Overlay:
  text "BUTTON 1" at 79.725,45.425 h0.8
  text "BUTTON 2" at 79.675,36.25 h0.8
  text "SENSORS" at 73.625,25.175 h0.8
  text "ON" at 77.1,23.6 h0.8
  text "OFF" at 76.825,13.625 h0.8
  text "BEETECH" at 70.497,10.45 h0.8
  text "TEMP BEEHIVE" at 23.574,10.425 h0.8
  text "CONNECTOR  IN" at 2.571,10.375 h0.8
  text "TEMP SCALE" at 34.821,10.35 h0.8
  text "CONNECTOR OUT" at 77.921,10.35 h0.8
  text "SCALE SENSOR" at 45.831,10.275 h0.8
  text "SOUND SENSOR" at 59.586,10.3 h0.8
  text "GND" at 25.625,7.122 h0.8 r90
  text "DATA" at 28.05,7.122 h0.8 r90
  text "VCC" at 30.675,7.122 h0.8 r90
  text "GND" at 36.875,7.047 h0.8 r90
  text "DATA" at 39.23,7.047 h0.8 r90
  text "VCC" at 41.825,7.047 h0.8 r90
  text "RX2" at 79.485,7.047 h0.8 r90
  text "TX2" at 82.55,7.047 h0.8 r90
  text "GND" at 85.35,7.047 h0.8 r90
  text "VIN" at 87.625,7.047 h0.8 r90
  text "RX1" at 4.565,7.022 h0.8 r90
  text "TX1" at 7.115,7.022 h0.8 r90
  text "GND" at 9.74,7.022 h0.8 r90
  text "VIN" at 12.14,7.022 h0.8 r90
  text "GND" at 61.675,6.997 h0.8 r90
  text "DATA" at 64.15,6.997 h0.8 r90
  text "VCC" at 66.7,6.997 h0.8 r90
  text "VCC" at 47.775,6.972 h0.8 r90
  text "SCK" at 50.35,6.972 h0.8 r90
  text "DATA" at 52.775,6.972 h0.8 r90
  text "GND" at 55.5,6.972 h0.8 r90
Bottom Overlay:
  text "BEETECH" at 30.387,50.35 h1.4
  text "MAINBOARD VERSION 02" at 30.382,48.104 h1

## Text inside footprints (layer, text, board x,y; h text height)
U2: Top Overlay "DC" at 0.33,34.214 h0.6; Top Overlay "RST" at 0.33,36.754 h0.6; Top Overlay "VCC" at 0.33,44.374 h0.6; Top Overlay "GND" at 0.33,41.834 h0.6; Top Overlay "CS" at 0.33,39.294 h0.6; Top Overlay "LED" at 0.33,26.594 h0.6; Top Overlay "SCK" at 0.33,29.134 h0.6; Top Overlay "MOSI" at 0.33,31.674 h0.6; Top Overlay "MISO" at 0.33,24.054 h0.6